# Altium PCB RbMotor_ECAT_RevB+.PcbDoc (part 2 of 4)
Units mm, origin at the board's own origin, x right, y up, seen from the top; angles counter-clockwise.
Board outline 58 x 58 mm, 4 copper layers (F.Cu, In1.Cu, In2.Cu, B.Cu); 285 components, 277 nets, 865 pads, 722 vias.
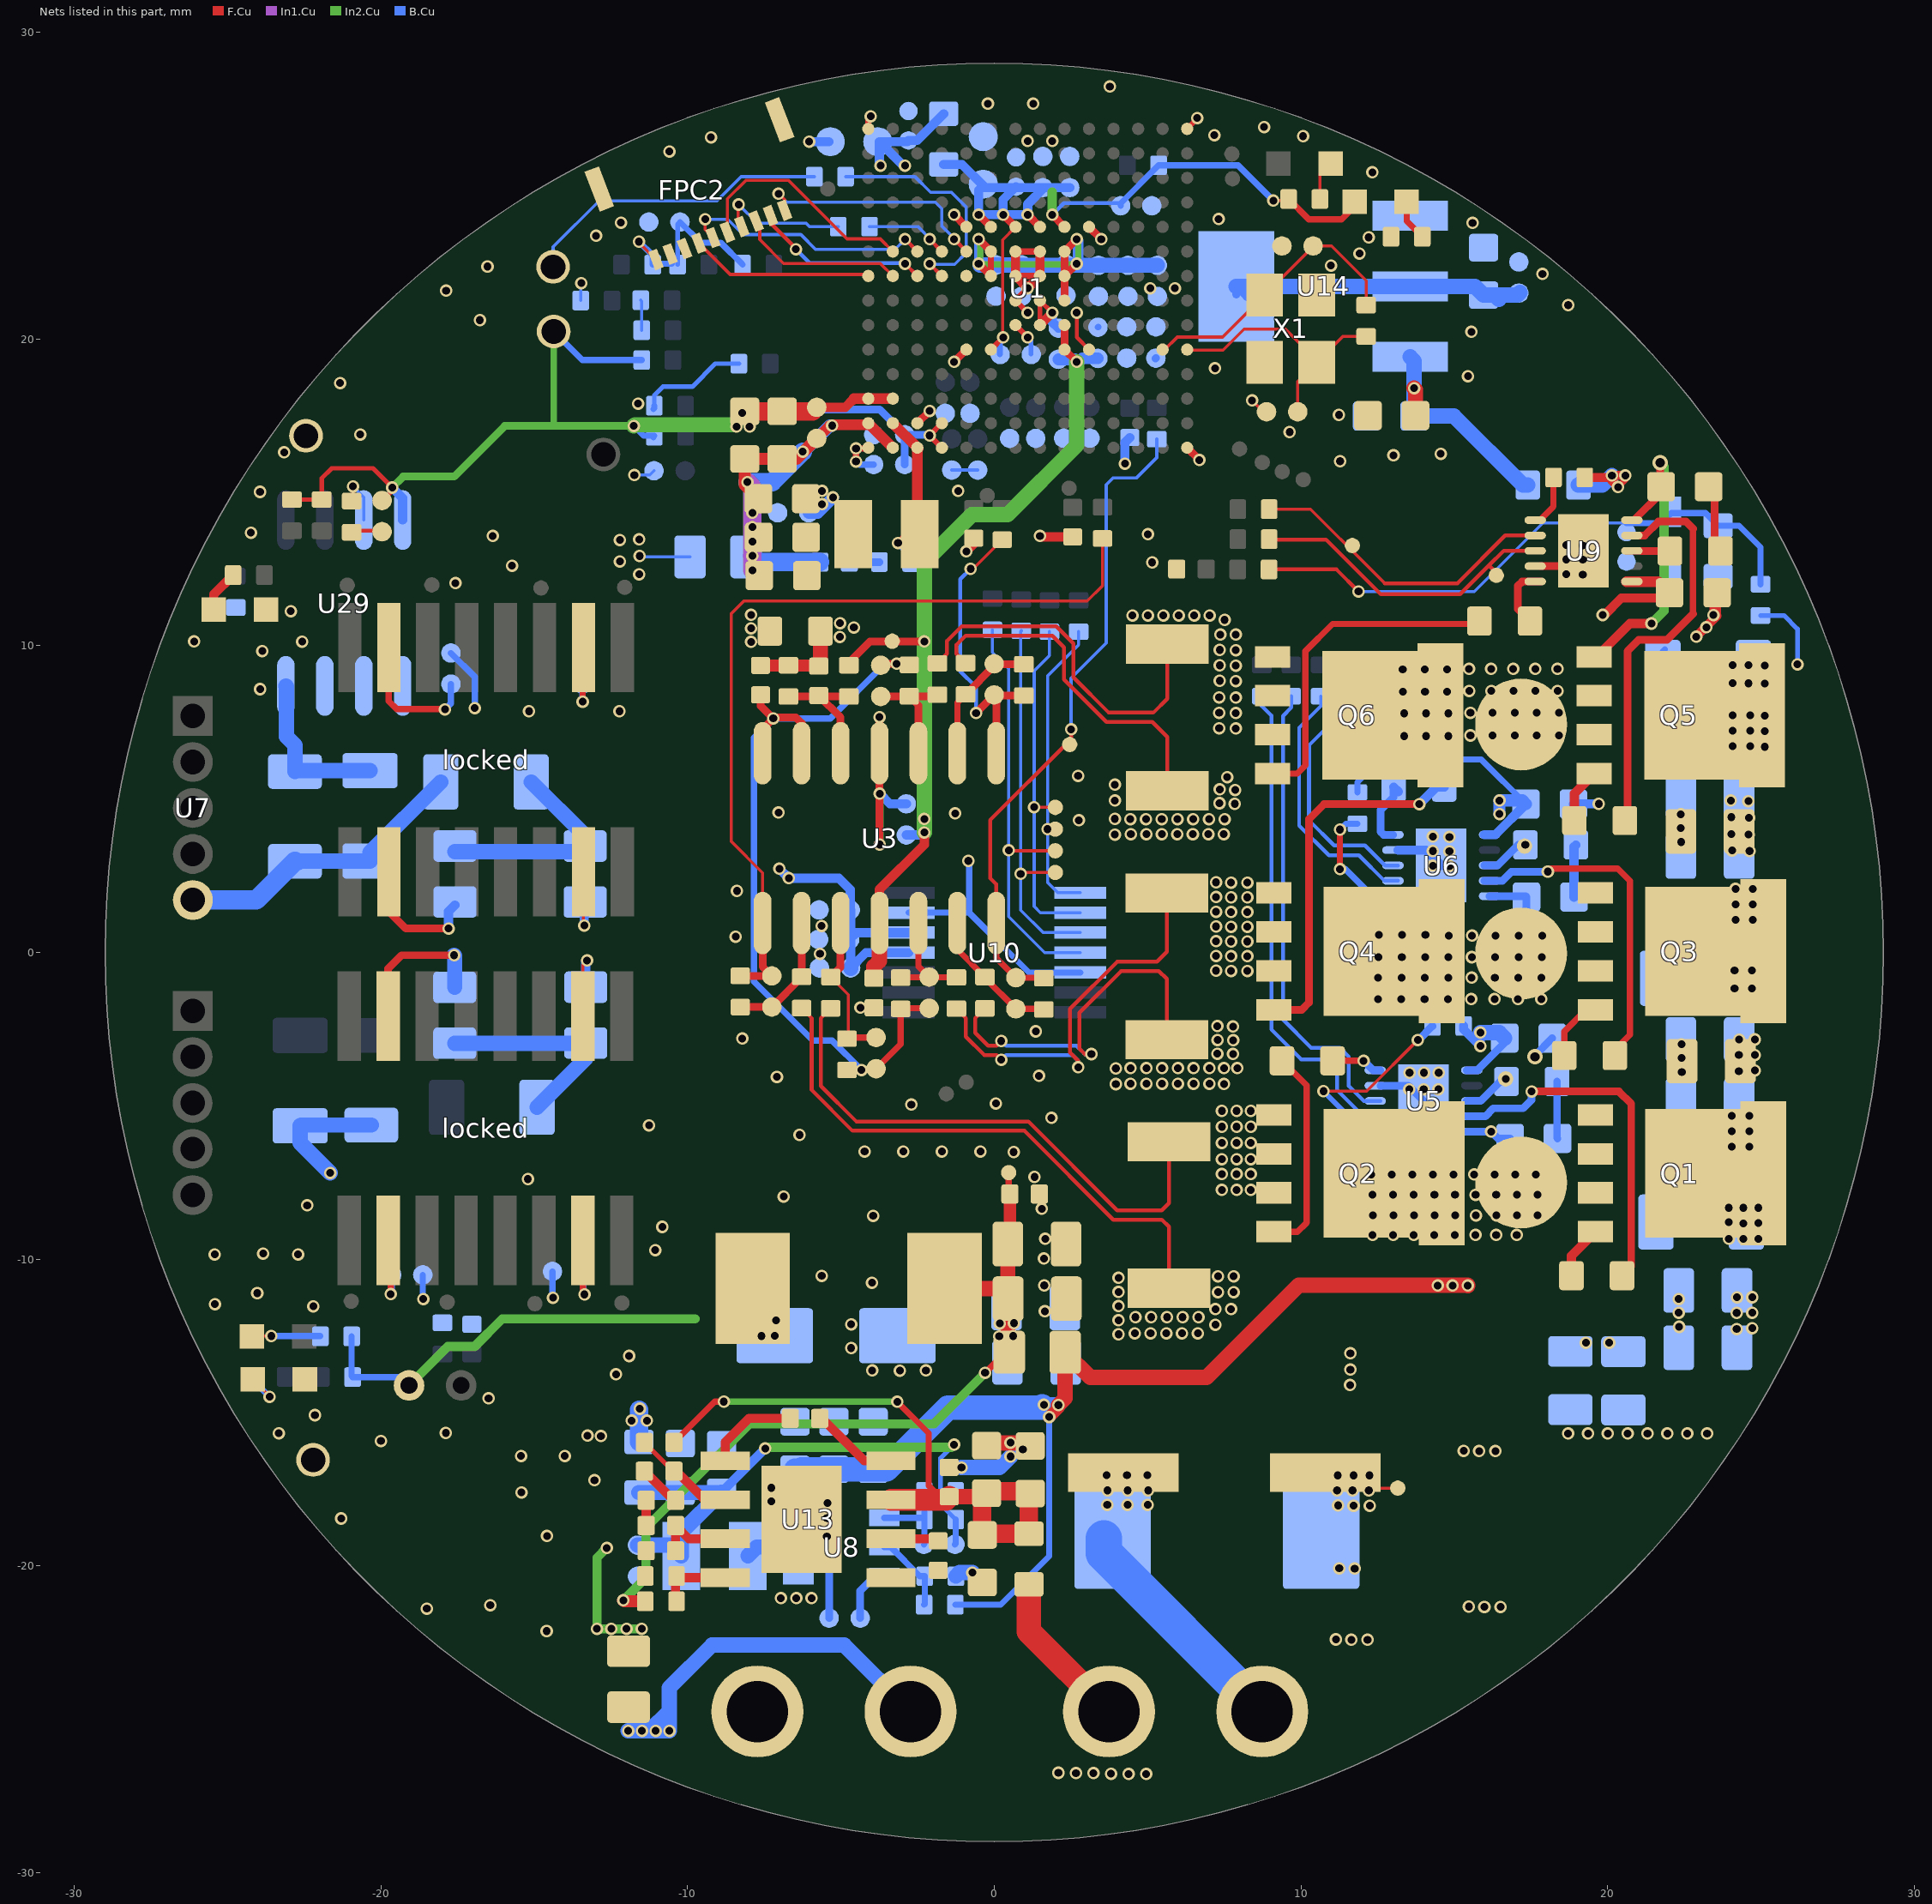
[diagram p4: the nets of this part, all layers, seen from the top]

## Part data
C1 C2 C7 C10 C14 C41 C43 C52 C53 C54 C63 C64 C65 C75 C76 C79 C80 C82 C95 C102 C109 C111 C113 C114: library part C_0603_1608Metric, "Capacitor SMD 0603 (1608 Metric), square (rectangular) end terminal, IPC_7351 nominal, (Body size source: IPC-SM-782 page 76, https://www.pcb-3d.com/wordpress/wp-content/uploads/ipc-sm-782a_amendment_1_and_2.pdf), generated with kicad-footprint-generator"
  C1 C79 C80: Company=SAMSUNG(三星), Model=CL10A226MP8NUNE, Sheetfile=01.SYS_POWER.kicad_sch, Sheetname=01.SYS_POWER, ki_description=0603, ki_keywords="cap capacitor"
  C2 C65 C95: Company=SAMSUNG(三星), Model=CL10A106MA8NRNC, Sheetfile=01.SYS_POWER.kicad_sch, Sheetname=01.SYS_POWER, ki_description=0603, ki_keywords="cap capacitor"
  C7: Company=SAMSUNG(三星), Model=CL10A105KO8NNNC, Sheetfile="13.Motor DriverB.kicad_sch", Sheetname="13.Motor DriverB", ki_description=0603
  C10 C82 C111 C113 C114: Company=SAMSUNG(三星), Model=CL10A226MP8NUNE, Sheetfile=02.MCU_POWER.kicad_sch, Sheetname=02.MCU_POWER, ki_description=0603, ki_keywords="cap capacitor"
  C14 C109: Company=YAGEO, Model=CC0603JRX7R9BB104, Sheetfile=01.SYS_POWER.kicad_sch, Sheetname=01.SYS_POWER, ki_description=0402, ki_keywords="cap capacitor"
  C41 C43: Company=SAMSUNG(三星), Model=CL10A106KP8NNNC, Sheetfile=03.MCU_PA_JTAG.kicad_sch, Sheetname=03.MCU_PA_JTAG, ki_description=0603
  C52: Company=YAGEO, Model=CC0603JRX7R9BB104, Sheetfile="13.Motor DriverB.kicad_sch", Sheetname="13.Motor DriverB", ki_description=0402, ki_keywords="cap capacitor"
  C53: Company=SAMSUNG(三星), Model=CL10A105KO8NNNC, Sheetfile="12.Motor DriverA.kicad_sch", Sheetname="12.Motor DriverA", ki_description=0603
  C54: Company=YAGEO, Model=CC0603JRX7R9BB104, Sheetfile="12.Motor DriverA.kicad_sch", Sheetname="12.Motor DriverA", ki_description=0402, ki_keywords="cap capacitor"
  C63: Company=SAMSUNG(三星), Model=CL10A105KO8NNNC, Sheetfile="14.Motor DriverC.kicad_sch", Sheetname="14.Motor DriverC", ki_description=0603
  C64: Company=YAGEO, Model=CC0603JRX7R9BB104, Sheetfile="14.Motor DriverC.kicad_sch", Sheetname="14.Motor DriverC", ki_description=0402, ki_keywords="cap capacitor"
  C75 C76 C102: Company=muRata(村田), Sheetfile=01.SYS_POWER.kicad_sch, Sheetname=01.SYS_POWER, ki_description=0805, ki_keywords="cap capacitor"
C3 C4 C5 C8 C9 C11 C12 C13 C18 C20 C21 C22 C23 C26 C27 C28 C29 C30 C31 C36 C37 C38 C40 C42 C44 C45 C46 C47 C48 C50 C67 C72 C78 C81 C84 C85 C86 C87 C88 C89 C92 C99 C100 C103 C104 C106 C112 C115 C116: library part C_0402
  C3 C4 C22 C23 C99 C112 C115: Company=SAMSUNG(三星), Model=CL05B104KO5NNNC, Sheetfile=02.MCU_POWER.kicad_sch, Sheetname=02.MCU_POWER, ki_description=0402, ki_keywords="cap capacitor"
  C5 C86 C87: Company=SAMSUNG(三星), Model=CL05A106MP5NUNC, Sheetfile=02.MCU_POWER.kicad_sch, Sheetname=02.MCU_POWER, ki_description=0402, ki_keywords="cap capacitor"
  C8 C11 C12 C40 C42 C45 C48: Company=SAMSUNG(三星), Model=CL05B104KO5NNNC, Sheetfile=08.MCU_OSC.kicad_sch, Sheetname=08.MCU_OSC, ki_description=0402, ki_keywords="cap capacitor"
  C9 C67 C88: Company=SAMSUNG(三星), Model=CL05A106MP5NUNC, Sheetfile=08.MCU_OSC.kicad_sch, Sheetname=08.MCU_OSC, ki_description=0402, ki_keywords="cap capacitor"
  C13 C18 C46 C47: Company=SAMSUNG(三星), Model=CL05B103KB5NNNC, Sheetfile=09.ECAT_IN_OUT.kicad_sch, Sheetname=09.ECAT_IN_OUT, ki_description="Unpolarized capacitor", ki_keywords="cap capacitor"
  C20 C21: Company=SAMSUNG(三星), Model=CL05A475MP5NRNC, Sheetfile=02.MCU_POWER.kicad_sch, Sheetname=02.MCU_POWER, ki_description=0402, ki_keywords="cap capacitor"
  C26 C27 C28 C29 C30 C31: Company=FH(风华), Model=0402CG270J500NT, Sheetfile="11.Current sampling.kicad_sch", Sheetname="11.Current sampling", ki_description=0402
  C36 C44: Company=SAMSUNG(三星), Model=CL05A475MP5NRNC, Sheetfile=08.MCU_OSC.kicad_sch, Sheetname=08.MCU_OSC, ki_description=0402, ki_keywords="cap capacitor"
  C37 C38: Company=YAGEO(国巨), Model=CC0402JRNPO9BN120, Sheetfile=08.MCU_OSC.kicad_sch, Sheetname=08.MCU_OSC, ki_description=0402, ki_keywords="cap capacitor"
  C50 C85 C106 C116: Company=SAMSUNG(三星), Model=CL05B104KO5NNNC, Sheetfile=03.MCU_PA_JTAG.kicad_sch, Sheetname=03.MCU_PA_JTAG, ki_description=0402, ki_keywords="cap capacitor"
  C72 C81 C104: Company=SAMSUNG(三星), Model=CL05B104KO5NNNC, Sheetfile=01.SYS_POWER.kicad_sch, Sheetname=01.SYS_POWER, ki_description="Unpolarized capacitor", ki_keywords="cap capacitor"
  C78: Company=FH(风华), Model=0402CG270J500NT, Sheetfile=01.SYS_POWER.kicad_sch, Sheetname=01.SYS_POWER, ki_description=0402
  C84: Company=SAMSUNG(三星), Model=CL05A106MP5NUNC, Sheetfile="11.Current sampling.kicad_sch", Sheetname="11.Current sampling", ki_description=0402, ki_keywords="cap capacitor"
  C89: Company=SAMSUNG(三星), Model=CL05B104KO5NNNC, Sheetfile="10.AS5047 Encoder.kicad_sch", Sheetname="10.AS5047 Encoder", ki_description=0402, ki_keywords="cap capacitor"
  C92 C100: Company=SAMSUNG(三星), Model=CL05A106MP5NUNC, Sheetfile="10.AS5047 Encoder.kicad_sch", Sheetname="10.AS5047 Encoder", ki_description=0402, ki_keywords="cap capacitor"
  C103: Company=SAMSUNG(三星), Model=CL05B104KO5NNNC, Sheetfile=15.EEROM.kicad_sch, Sheetname=15.EEROM, ki_description="Unpolarized capacitor", ki_keywords="cap capacitor"
C6 C15 C16 C60 C62 C83 C110: library part C_1206_3216Metric, ki_description=1206, ki_keywords="cap capacitor"
  C6: Company=FH(风华), Model=1206B102K202NT, Sheetfile="13.Motor DriverB.kicad_sch", Sheetname="13.Motor DriverB"
  C15 C16 C83 C110: Company=YAGEO(国巨), Model=CC1206KKX7RDBB102, Sheetfile=09.ECAT_IN_OUT.kicad_sch, Sheetname=09.ECAT_IN_OUT
  C60: Company=FH(风华), Model=1206B102K202NT, Sheetfile="12.Motor DriverA.kicad_sch", Sheetname="12.Motor DriverA"
  C62: Company=FH(风华), Model=1206B102K202NT, Sheetfile="14.Motor DriverC.kicad_sch", Sheetname="14.Motor DriverC"
C17 C19 C24 C25 C33 C39 C49 C55 C58 C59 C61 C69 C70 C77 C96 C97 C98: library part C_0805_2012Metric, Sheetfile=01.SYS_POWER.kicad_sch, Sheetname=01.SYS_POWER, ki_description=0805
  C17 C19 C24 C25 C33 C39 C49 C55 C58 C59 C61 C70 C96: Company=muRata(村田), Model=GRM21BR6YA106KE43L, ki_keywords="cap capacitor"
  C69 C77 C97 C98: Company=SAMSUNG(三星), Model=CL21A226MAQNNNE
C32 C34 C35 C51 C56 C57 C66 C68 C71 C73 C90 C91 C94 C101 C107 C108 C117 R82 R83 R85 R86: library part C_0402_1005Metric, "Capacitor SMD 0402 (1005 Metric), square (rectangular) end terminal, IPC_7351 nominal, (Body size source: IPC-SM-782 page 76, https://www.pcb-3d.com/wordpress/wp-content/uploads/ipc-sm-782a_amendment_1_and_2.pdf), generated with kicad-footprint-generator"
  C32 C34 C35: Company=YAGEO(国巨), Model=CC0402KRX7R7BB103, Sheetfile="11.Current sampling.kicad_sch", Sheetname="11.Current sampling", ki_description=0402, ki_keywords="cap capacitor"
  C51 C56 C57: Company=SAMSUNG(三星), Model=0402B104K500NT, Sheetfile="11.Current sampling.kicad_sch", Sheetname="11.Current sampling", ki_description=0402, ki_keywords="cap capacitor"
  C66: Company=YAGEO, Model=CC0603JRX7R9BB102, Sheetfile="12.Motor DriverA.kicad_sch", Sheetname="12.Motor DriverA", ki_description=0603, ki_keywords="cap capacitor"
  C68: Company=YAGEO, Model=CC0603JRX7R9BB104, Sheetfile=01.SYS_POWER.kicad_sch, Sheetname=01.SYS_POWER, ki_description=0402, ki_keywords="cap capacitor"
  C71 C73: Company=YAGEO, Sheetfile=01.SYS_POWER.kicad_sch, Sheetname=01.SYS_POWER, ki_description=0402, ki_keywords="cap capacitor"
  C90: Company=YAGEO(国巨), Model=CC0402JRNPO9BN470, Sheetfile=01.SYS_POWER.kicad_sch, Sheetname=01.SYS_POWER, ki_description=0402, ki_keywords="cap capacitor"
  C91: Company=YAGEO, Model=CC0603JRX7R9BB102, Sheetfile=01.SYS_POWER.kicad_sch, Sheetname=01.SYS_POWER, ki_description=0603, ki_keywords="cap capacitor"
  C94 C101: Company=SAMSUNG(三星), Model=CL05B103KB5NNNC, Sheetfile=03.MCU_PA_JTAG.kicad_sch, Sheetname=03.MCU_PA_JTAG, ki_description=0402, ki_keywords="cap capacitor"
  C107: Company=SAMSUNG(三星), Model=CL05B103KB5NNNC, Sheetfile="12.Motor DriverA.kicad_sch", Sheetname="12.Motor DriverA", ki_description=0402, ki_keywords="cap capacitor"
  C108: Company=YAGEO(国巨), Model=CC0402KRX7R7BB103, Sheetfile=15.EEROM.kicad_sch, Sheetname=15.EEROM, ki_description=0402, ki_keywords="cap capacitor"
  C117: Company=SAMSUNG(三星), Model=CL05B222KB5NNNC, Sheetfile=02.MCU_POWER.kicad_sch, Sheetname=02.MCU_POWER, ki_description=0402, ki_keywords="cap capacitor"
  R82: Company=UNI-ROYAL(厚声), Model=0603WAF1003T5E, Sheetfile=01.SYS_POWER.kicad_sch, Sheetname=01.SYS_POWER, ki_description=Resistor, ki_keywords="R res resistor"
  R83: Company=UNI-ROYAL(厚声), Model=0603WAF2492T5E, Sheetfile=01.SYS_POWER.kicad_sch, Sheetname=01.SYS_POWER, ki_description=Resistor, ki_keywords="R res resistor"
  R85: Company=UNI-ROYAL(厚声), Model=0402WGF7322TCE, Sheetfile=01.SYS_POWER.kicad_sch, Sheetname=01.SYS_POWER, ki_description=Resistor, ki_keywords="R res resistor"
  R86: Company=UNI-ROYAL(厚声), Model=0402WGF1003TCE, Sheetfile=01.SYS_POWER.kicad_sch, Sheetname=01.SYS_POWER, ki_description=Resistor, ki_keywords="R res resistor"
C74: library part CAP-SMD_BD8.0-L8.3-W8.3-LS9.1-FD, Company=DMBJ(振宝佳), Model=JBLM2221M035D090RTM, Sheetfile=01.SYS_POWER.kicad_sch, Sheetname=01.SYS_POWER, ki_description="固态电容  SMD"
D1: library part D_SMC, "Diode SMC (DO-214AB)", Company=Littelfuse(美国力特), Model=SMCJ28A, Sheetfile=01.SYS_POWER.kicad_sch, Sheetname=01.SYS_POWER, ki_description=静电和浪涌保护(TVS/ESD)
D6: library part D_SMA, "Diode SMA (DO-214AC)", Company=YANGJIE(扬杰), Model=SS34A, Sheetfile=01.SYS_POWER.kicad_sch, Sheetname=01.SYS_POWER, ki_description=肖特基二极管，40V,3A
D10: library part SOD-323, Company=Nexperia(安世), Model=BZX384-C5V1, Sheetfile="12.Motor DriverA.kicad_sch", Sheetname="12.Motor DriverA", ki_description="稳压二极管 11V"
FB1 FB3 FB4 FB5 R15 R45 R46 R50 R53 R54 R71 R72 R76 R87 R92: library part R_0603_1608Metric
  FB1 FB3: Company=muRata(村田), Model=BLM18KG601SN1D, Sheetfile=01.SYS_POWER.kicad_sch, Sheetname=01.SYS_POWER, ki_description=BLM18KG601SN1D
  FB4: Company=Sunlord(顺络), Model=PZ1608D101-2R0TF, Sheetfile=01.SYS_POWER.kicad_sch, Sheetname=01.SYS_POWER, ki_description=PZ1608D101-2R0TF
  FB5: Company=Sunlord(顺络), Model=PZ1608D101-2R0TF, Sheetfile=03.MCU_PA_JTAG.kicad_sch, Sheetname=03.MCU_PA_JTAG, ki_description=PZ1608D101-2R0TF
  R15 R50: Company=UNI-ROYAL(厚声), Model=0603WAF470JT5E, Sheetfile="13.Motor DriverB.kicad_sch", Sheetname="13.Motor DriverB", ki_description=水泥电阻
  R45: Company=UNI-ROYAL(厚声), Model=0603WAF0000T5E, Sheetfile="11.Current sampling.kicad_sch", Sheetname="11.Current sampling", ki_description=Resistor, ki_keywords="R res resistor"
  R46: Company=UNI-ROYAL(厚声), Model=0603WAF220KT5E, Sheetfile="13.Motor DriverB.kicad_sch", Sheetname="13.Motor DriverB", ki_description=Resistor, ki_keywords="R res resistor"
  R53 R54: Company=UNI-ROYAL(厚声), Model=0603WAF470JT5E, Sheetfile="12.Motor DriverA.kicad_sch", Sheetname="12.Motor DriverA", ki_description=水泥电阻
  R71 R76: Company=UNI-ROYAL(厚声), Model=0603WAF470JT5E, Sheetfile="14.Motor DriverC.kicad_sch", Sheetname="14.Motor DriverC", ki_description=水泥电阻
  R72: Company=UNI-ROYAL(厚声), Model=0603WAF220KT5E, Sheetfile="14.Motor DriverC.kicad_sch", Sheetname="14.Motor DriverC", ki_description=Resistor, ki_keywords="R res resistor"
  R87: Company=YAGEO\n, Model=RC0603FR-0710KL\n, Sheetfile="12.Motor DriverA.kicad_sch", Sheetname="12.Motor DriverA", ki_description=Resistor, ki_keywords="R res resistor"
  R92: Company=UNI-ROYAL(厚声), Model=0603WAF220KT5E, Sheetfile="12.Motor DriverA.kicad_sch", Sheetname="12.Motor DriverA", ki_description=Resistor, ki_keywords="R res resistor"
FB2 R3 R4 R5 R17 R18 R21: library part R_0805_2012Metric, "Resistor SMD 0805 (2012 Metric), square (rectangular) end terminal, IPC_7351 nominal, (Body size source: IPC-SM-782 page 72, https://www.pcb-3d.com/wordpress/wp-content/uploads/ipc-sm-782a_amendment_1_and_2.pdf), generated with kicad-footprint-generator"
  FB2: Company=Sunlord(顺络), Model=PZ2012U101-2R0TF, Sheetfile=01.SYS_POWER.kicad_sch, Sheetname=01.SYS_POWER, ki_description=PZ2012U101-2R0TF
  R3: Company=FH(风华), Model=RS-05000JT, Sheetfile=01.SYS_POWER.kicad_sch, Sheetname=01.SYS_POWER, ki_description=Resistor, ki_keywords="R res resistor"
  R4 R5 R17 R18: Company=UNI-ROYAL(厚声), Model=0805W8F750JT5E, Sheetfile=09.ECAT_IN_OUT.kicad_sch, Sheetname=09.ECAT_IN_OUT, ki_description=Resistor, ki_keywords="R res resistor"
  R21: Company=FH(风华), Model=RS-05000JT, Sheetfile=02.MCU_POWER.kicad_sch, Sheetname=02.MCU_POWER, ki_description=Resistor, ki_keywords="R res resistor"
FPC2: library part FPC_10P_0.5mm_JTAG, Company=THD(台华达), Model=THD0510-10CL-GF, Sheetfile=03.MCU_PA_JTAG.kicad_sch, Sheetname=03.MCU_PA_JTAG, ki_description=下接
J1 J5: library part "XT30U 母头插座", Model="XT30UPB-M 公头 PCB焊板", Sheetfile=01.SYS_POWER.kicad_sch, Sheetname=01.SYS_POWER, ki_description=P2.54, ki_keywords=connector
L1 L3: library part L252010, Company=muRata(村田), Model=DFE252010F-4R7M, ki_description=DFE252010F-4R7M
  L1: Sheetfile=02.MCU_POWER.kicad_sch, Sheetname=02.MCU_POWER
  L3: Sheetfile=01.SYS_POWER.kicad_sch, Sheetname=01.SYS_POWER
L2: library part IND-SMD_L7.0-W6.6_FXL0630, Company=cjiang(长江微电), Model=FXL0630-150-M, Sheetfile=01.SYS_POWER.kicad_sch, Sheetname=01.SYS_POWER, ki_description=1276AS-H-4R7M=P2
LED1 LED2 LED3 LED4 LED5: library part LED_0603, Company=国星光电
  LED1: Model=NCD0603C1, Sheetfile=01.SYS_POWER.kicad_sch, Sheetname=01.SYS_POWER
  LED2 LED5: Model=NCD0603C1, Sheetfile=09.ECAT_IN_OUT.kicad_sch, Sheetname=09.ECAT_IN_OUT
  LED3: Model=NCD0603R1, Sheetfile=09.ECAT_IN_OUT.kicad_sch, Sheetname=09.ECAT_IN_OUT, ki_description=0603
  LED4: Model=NCD0603R1, Sheetfile=05.MCU_PC.kicad_sch, Sheetname=05.MCU_PC
locked locked: library part H1102_XFMR16_SM, Company=YDS(元册科技), Model=11FB-05NL, Sheetfile=09.ECAT_IN_OUT.kicad_sch, Sheetname=09.ECAT_IN_OUT
Q1 Q2 Q3 Q4 Q5 Q6: library part sot_669_2, Company=Nexperia(安世), Model=PSMN1R4-40YLD, ki_description="场效应管 N沟道"
  Q1 Q2: Sheetfile="12.Motor DriverA.kicad_sch", Sheetname="12.Motor DriverA"
  Q3 Q4: Sheetfile="13.Motor DriverB.kicad_sch", Sheetname="13.Motor DriverB"
  Q5 Q6: Sheetfile="14.Motor DriverC.kicad_sch", Sheetname="14.Motor DriverC"
R1 R2 R6 R7 R8 R9 R11 R12 R13 R14 R16 R19 R20 R22 R23 R24 R25 R26 R27 R28 R29 R30 R31 R32 R33 R34 R35 R36 R37 R38 R39 R40 R41 R42 R43 R44 R47 R48 R51 R56 R57 R58 R59 R60 R61 R62 R63 R64 R65 R66 R67 R68 R70 R75 R79 R80 R84 R88 R89 R90 R91 R128 R129 R130: library part R_0402_1005Metric, ki_description=Resistor
  R1 R24 R27 R29 R31 R33 R37 R38: Company=UNI-ROYAL(厚声), Model=0402WGF1002TCE, Sheetfile="11.Current sampling.kicad_sch", Sheetname="11.Current sampling", ki_keywords="R res resistor"
  R2 R7: Company=FH(风华), Model=RC-02W2491FT, Sheetfile=09.ECAT_IN_OUT.kicad_sch, Sheetname=09.ECAT_IN_OUT, ki_keywords="R res resistor"
  R6 R9 R11 R12 R13 R16: Company=UNI-ROYAL(厚声), Sheetfile="11.Current sampling.kicad_sch", Sheetname="11.Current sampling", ki_keywords="R res resistor"
  R8: Company=UNI-ROYAL(厚声), Model=0402WGF1001TCE, Sheetfile=01.SYS_POWER.kicad_sch, Sheetname=01.SYS_POWER, ki_keywords="R res resistor"
  R14: Company=UNI-ROYAL(厚声), Model=CQ02WGJ0105TCE, Sheetfile=08.MCU_OSC.kicad_sch, Sheetname=08.MCU_OSC, ki_keywords="R res resistor"
  R19: Company=UNI-ROYAL(厚声), Model=0402WGF1002TCE, Sheetfile="13.Motor DriverB.kicad_sch", Sheetname="13.Motor DriverB", ki_keywords="R res resistor"
  R20: Company=UNI-ROYAL(厚声), Model=0402WGF1002TCE, Sheetfile="12.Motor DriverA.kicad_sch", Sheetname="12.Motor DriverA", ki_keywords="R res resistor"
  R22: Company=UNI-ROYAL(厚声), Model=0402WGF100JTCE, Sheetfile=02.MCU_POWER.kicad_sch, Sheetname=02.MCU_POWER, ki_keywords="R res resistor"
  R23 R32 R59: ASSY_OPT=DNP, Company=UNI-ROYAL(厚声), Model=0402WGF4701TCE, Sheetfile=09.ECAT_IN_OUT.kicad_sch, Sheetname=09.ECAT_IN_OUT, ki_keywords="R res resistor"
  R25 R44 R51 R56 R61 R62: Company=UNI-ROYAL(厚声), Model=0402WGF4701TCE, Sheetfile=09.ECAT_IN_OUT.kicad_sch, Sheetname=09.ECAT_IN_OUT, ki_keywords="R res resistor"
  R26: Company=UNI-ROYAL(厚声), Sheetfile=01.SYS_POWER.kicad_sch, Sheetname=01.SYS_POWER, ki_keywords="R res resistor"
  R28: Company=UNI-ROYAL(厚声), Model=0402WGF1002TCE, Sheetfile=08.MCU_OSC.kicad_sch, Sheetname=08.MCU_OSC, ki_keywords="R res resistor"
  R30: Company=UNI-ROYAL(厚声), Model=0402WGF1002TCE, Sheetfile="14.Motor DriverC.kicad_sch", Sheetname="14.Motor DriverC", ki_keywords="R res resistor"
  R34 R35 R36: Company=UNI-ROYAL(厚声), Model=0402WGF100JTCE, Sheetfile="11.Current sampling.kicad_sch", Sheetname="11.Current sampling", ki_keywords="R res resistor"
  R39: ASSY_OPT=DNP, Company=UNI-ROYAL(厚声), Model=0402WGF3300TCE, Sheetfile=09.ECAT_IN_OUT.kicad_sch, Sheetname=09.ECAT_IN_OUT, ki_keywords="R res resistor"
  R40 R60: Company=UNI-ROYAL(厚声), Model=0402WGF3300TCE, Sheetfile=09.ECAT_IN_OUT.kicad_sch, Sheetname=09.ECAT_IN_OUT, ki_keywords="R res resistor"
  R41: Company=UNI-ROYAL(厚声), Model=0402WGF1000TCE, Sheetfile=03.MCU_PA_JTAG.kicad_sch, Sheetname=03.MCU_PA_JTAG, ki_keywords="R res resistor"
  R42 R70 R84: Company=UNI-ROYAL(厚声), Model=0402WGF1002TCE, Sheetfile=01.SYS_POWER.kicad_sch, Sheetname=01.SYS_POWER, ki_keywords="R res resistor"
  R43: Company=UNI-ROYAL(厚声), Model=0402WGF1002TCE, Sheetfile="00. MAIN.kicad_sch", Sheetname=MAIN, ki_keywords="R res resistor"
  R47: Company=UNI-ROYAL(厚声), Model=0402WGF1001TCE, Sheetfile=05.MCU_PC.kicad_sch, Sheetname=05.MCU_PC, ki_keywords="R res resistor"
  R48 R58 R63: Company=UNI-ROYAL(厚声), Model=0402WGF330JTCE, Sheetfile="12.Motor DriverA.kicad_sch", Sheetname="12.Motor DriverA", ki_keywords="R res resistor"
  R57: Company=UNI-ROYAL(厚声), Model=0402WGF1002TCE, Sheetfile=15.EEROM.kicad_sch, Sheetname=15.EEROM, ki_keywords="R res resistor"
  R64 R65: Company=UNI-ROYAL(厚声), Model=0402WGF330JTCE, Sheetfile="13.Motor DriverB.kicad_sch", Sheetname="13.Motor DriverB", ki_keywords="R res resistor"
  R66 R68: Company=UNI-ROYAL(厚声), Model=0402WGF330JTCE, Sheetfile="14.Motor DriverC.kicad_sch", Sheetname="14.Motor DriverC", ki_keywords="R res resistor"
  R67: Company=UNI-ROYAL(厚声), Model=0402WGF4532TCE, Sheetfile=01.SYS_POWER.kicad_sch, Sheetname=01.SYS_POWER, ki_keywords="R res resistor"
  R75: Company=UNI-ROYAL(厚声), Model=0402WGF1002TCE, Sheetfile=03.MCU_PA_JTAG.kicad_sch, Sheetname=03.MCU_PA_JTAG, ki_keywords="R res resistor"
  R79: Company=UNI-ROYAL(厚声), Model=0402WGF2003TCE, Sheetfile="12.Motor DriverA.kicad_sch", Sheetname="12.Motor DriverA"
  R80: Company=UNI-ROYAL(厚声), Model=0402WGF1403TCE, Sheetfile=01.SYS_POWER.kicad_sch, Sheetname=01.SYS_POWER, ki_keywords="R res resistor"
  R88 R89 R90 R91: Company=UNI-ROYAL(厚声), Model=0402WGF330JTCE, Sheetfile="00. MAIN.kicad_sch", Sheetname=MAIN, ki_keywords="R res resistor"
  R128 R129 R130: Company=UNI-ROYAL(厚声), Model=0402WGF4701TCE, Sheetfile=15.EEROM.kicad_sch, Sheetname=15.EEROM, ki_keywords="R res resistor"
R10 R69: library part R_1206_3216Metric, Company=Viking(光颉), Model=ARG06BTC1004, Sheetfile=09.ECAT_IN_OUT.kicad_sch, Sheetname=09.ECAT_IN_OUT, ki_description=Resistor, ki_keywords="R res resistor"
R49: library part RES-TH_L2.5-W2.5-P1.70-D0.3, SuppliersPartNumber=C5439706, Company=SURGING(绍鑫), Model=MF52A103F3950, Sheetfile=15.EEROM.kicad_sch, Sheetname=15.EEROM, ki_description=NTC热敏电阻
R52 R55 R78: library part R2010, Company=Milliohm(毫欧), Model=HoLR2010-1W-1mR-1%, ki_description=Resistor
  R52: Sheetfile="13.Motor DriverB.kicad_sch", Sheetname="13.Motor DriverB"
  R55: Sheetfile="12.Motor DriverA.kicad_sch", Sheetname="12.Motor DriverA"
  R78: Sheetfile="14.Motor DriverC.kicad_sch", Sheetname="14.Motor DriverC"
TP1 TP2 TP3 TP9 TP10 TP11 TP12 TP13 TP14 TP15 TP16 TP17 TP18 TP19 TP20 TP21 TP22 TP23 TP24 TP25 TP26 TP27 TP28 TP29 TP30 TP31 TP32 TP33 TP35 TP36 TP40: library part TestPoint_Pad_D0.5mm, "SMD pad as test Point, diameter 1.0mm", ki_description="test point", ki_keywords="test point tp"
  TP1 TP36 TP40: Sheetfile=01.SYS_POWER.kicad_sch, Sheetname=01.SYS_POWER
  TP2 TP3 TP9 TP12 TP13 TP15 TP18 TP19 TP20 TP21 TP22 TP23 TP24 TP25 TP26 TP27 TP28 TP29 TP30 TP31 TP32: Sheetfile="00. MAIN.kicad_sch", Sheetname=MAIN
  TP10 TP11: Sheetfile="14.Motor DriverC.kicad_sch", Sheetname="14.Motor DriverC"
  TP14: Sheetfile="11.Current sampling.kicad_sch", Sheetname="11.Current sampling"
  TP16: Sheetfile="13.Motor DriverB.kicad_sch", Sheetname="13.Motor DriverB"
  TP17: Sheetfile="12.Motor DriverA.kicad_sch", Sheetname="12.Motor DriverA"
  TP33 TP35: Sheetfile=05.MCU_PC.kicad_sch, Sheetname=05.MCU_PC
TP4 TP5 TP6: library part SMD_3mm_Pad, ki_description="test point", ki_keywords="test point tp"
  TP4: Sheetfile="13.Motor DriverB.kicad_sch", Sheetname="13.Motor DriverB"
  TP5: Sheetfile="12.Motor DriverA.kicad_sch", Sheetname="12.Motor DriverA"
  TP6: Sheetfile="14.Motor DriverC.kicad_sch", Sheetname="14.Motor DriverC"
TP7 TP8 TP37 TP38 TP39: library part TestPoint_1.5, "SMD pad as test Point, diameter 1.0mm", ki_description="test point", ki_keywords="test point tp"
  TP7 TP8 TP37: Sheetfile=03.MCU_PA_JTAG.kicad_sch, Sheetname=03.MCU_PA_JTAG
  TP38 TP39: Sheetfile=08.MCU_OSC.kicad_sch, Sheetname=08.MCU_OSC
U1: library part BGA-196_14x14_12.0x12.0mm_P0.8mm, Sheetfile=02.MCU_POWER.kicad_sch, Sheetname=02.MCU_POWER
U2 U7: library part CONN-TH_ZH1.5-5A, Company=Bossie(博锡), Model=BX-ZH1.5-5PZZ, Sheetfile=09.ECAT_IN_OUT.kicad_sch, Sheetname=09.ECAT_IN_OUT
U3: library part SOIC-14_L8.7-W3.9, Company=3PEAK(思瑞浦), Model=TP2274-SR, Sheetfile="11.Current sampling.kicad_sch", Sheetname="11.Current sampling", ki_description=TP2274-TR,TSSOP-14,3PEAK
U5 U6 U9: library part QFN-10_L3.0-W3.0-P0.50-LS3.0-BL-EP, ki_description="MP1907GQ–Z,QFN10 (3 x 3 mm),MPS"
  U5: Sheetfile="12.Motor DriverA.kicad_sch", Sheetname="12.Motor DriverA"
  U6: Sheetfile="13.Motor DriverB.kicad_sch", Sheetname="13.Motor DriverB"
  U9: Sheetfile="14.Motor DriverC.kicad_sch", Sheetname="14.Motor DriverC"
U8: library part SOT-23-6, Company=TI, Model=TPS54302DDCR, Sheetfile=01.SYS_POWER.kicad_sch, Sheetname=01.SYS_POWER
U10: library part TSSOP-14_L5.0-W4.4-P0.65-LS6.4-BL, SuppliersPartNumber=C962063, Company=ams(艾迈斯半导体), Model=AS5047P-ATSM, Sheetfile="10.AS5047 Encoder.kicad_sch", Sheetname="10.AS5047 Encoder", ki_description=位置传感器
U13: library part SOIC-8EP, Company=Joulwatt(杰华特), Model=JW5116FESOP#TRPBF, Sheetfile=01.SYS_POWER.kicad_sch, Sheetname=01.SYS_POWER, ki_description=DC-DC电源芯片
U14: library part SOT-223-4_L6.5-W3.5-P2.30-LS7.0-BR, Company=ST(意法半导体), Model=LDL1117S33R, Sheetfile=01.SYS_POWER.kicad_sch, Sheetname=01.SYS_POWER, ki_description=线性稳压器(LDO)
U29: library part SOIC-8, Company=IDCHIP(英锐芯), Model=AT24C02, Sheetfile=15.EEROM.kicad_sch, Sheetname=15.EEROM, ki_description="I2C 存储容量：2Kbit", ki_keywords="Nonvolatile Non-Volatile Memory ROM ST"
X1: library part 3225, Company=EPSON(爱普生), Model=X1E0000210129, Sheetfile=08.MCU_OSC.kicad_sch, Sheetname=08.MCU_OSC

## Via types
v1: diameter 0.406, hole 0.254, F.Cu to B.Cu, tented both sides, 720 vias
v2: diameter 0.5, hole 0.3, F.Cu to B.Cu, tented both sides, 2 vias

## Nets (pads, with @x,y where several pads share a name; then routed paths per layer and width w, separated by ;. In a path a pad name is that pad's centre, name@x,y a point inside that pad or via, vN(x,y) a via of type N, cw(c..) or ccw(c..) an arc to the next point about the centre after c; other vN are vias at no path point)
+1V2: C3.1 C4.1 C5.1 C82.1 C86.1 C87.1 C99.1 C111.1 C113.1 C115.1 L1.1 U1.F6 U1.F9 U1.G6 U1.G9 U1.H9 | length 18.1
  F.Cu w0.2: U1.G6@-0.11,22.06 U1.F6@-0.11,22.86
  F.Cu w0.254: v1(-0.51,22.46) U1.G6@-0.11,22.06 ; v1(-0.51,23.26) U1.F6@-0.11,22.86 ; U1.H9@2.29,21.26 U1.F9@2.29,22.86 v1(2.69,23.26) ; U1.G9@2.29,22.06 v1(2.69,22.46)
  In2.Cu w0.2: v1@-0.46,23.24 -0.46,22.44 2.74,22.44 v1@2.74,23.24
  B.Cu w0.203: C115.1@-6.052,14.34 C115.1@-6.052,14.512
  B.Cu w0.3: v1(-0.51,22.46) v1(-0.51,23.26)
  B.Cu w0.35: v1(-0.51,22.46) v1@-0.468,22.418 ; v1(2.69,23.26) 2.74,23.21 v1@2.74,22.44
  B.Cu w0.4: C115.1@-6.052,14.34 -5.76,14.34 v1(-5.26,14.84)
  B.Cu w0.5: v1@-0.468,22.418 0.658,22.418 0.666,22.41 C5.1@5.318,22.41
  other v1: -5.62,14.62 -5.62,15.05
+3.3V: C8.2 C9.1 C10.1 C41.1 C42.1 C89.1 C92.1 C94.1 C100.1 C103.1 C106.1 C112.1 C114.1 FB1.1 FB5.2 FPC2.10 LED1.2 R23.2 R25.2 R28.1 R43.2 R47.1 R49.2 R51.2 R60.2 R61.2 R62.2 R129.2 R130.2 TP8.1 U1.E9 U1.M1 U1.M2 U1.N4 U1.P4 U10.11 U10.12 U29.8 | length 87.2
  F.Cu w0.102: v1(-11.59,23.18) -11.59,23.148 FPC2.10@-11.038,22.596 ; v1(9.1,24.52) 9.55,24.52 R47.1@9.6,24.57
  F.Cu w0.127: C103.1@-19.97,14.71 -19.64,15.04 v1(-19.64,15.16)
  F.Cu w0.15: R129.2@-22.91,14.77 R130.2@-21.94,14.77 -21.94,15.46 -21.61,15.79 -20.27,15.79 v1(-19.64,15.16)
  F.Cu w0.178: U1.P4@-1.71,16.46 v1(-2.11,16.86) U1.N4@-1.71,17.26
  F.Cu w0.203: R47.1@9.6,24.57 10.26,23.91 11.33,23.91 11.749,24.329 LED1.2@11.749,24.48
  F.Cu w0.254: v1(1.89,24.06) U1.E9@2.29,23.66
  F.Cu w0.3: C112.1@-5.79,17.778 -4.862,17.778 -4.6,18.04
  F.Cu w0.35: -4.6,18.04 -4.58,18.06 U1.M1@-4.11,18.06 U1.M2@-3.31,18.06
  F.Cu w0.6: C10.1@-8.14,17.645 C114.1@-6.92,17.645 C112.1@-5.923,17.645
  In2.Cu w0.2: -14.39,17.17 -14.37,17.19 TP8.1@-14.37,20.25
  In2.Cu w0.25: v1(-19.64,15.16) -19.28,15.52 -17.62,15.52 -15.97,17.17 -14.39,17.17 v1(-11.76,17.17)
  In2.Cu w0.3: R49.2@-19.09,-14.12 -17.82,-12.85 -16.95,-12.85 -16.05,-11.95 -9.76,-11.95 ; v1(1.89,24.06) 1.89,24.8
  In2.Cu w0.5: v1(-11.76,17.17) -11.72,17.21 v1@-8.44,17.21
  B.Cu w0.102: R49.2@-19.36,-13.85 R49.2@-19.09,-14.12 ; R62.2@-8.375,22.674 -8.21,22.509 R62.2@-8.21,22.43
  B.Cu w0.13: v1(1.89,24.06) 2.27,24.44 4.032,24.44 C42.1@4.122,24.35
  B.Cu w0.15: R61.2@-10.33,22.43 -10.33,23.742 C106.1@-10.252,23.82
  B.Cu w0.2: R60.2@-20.96,-12.52 -20.96,-13.82 R25.2@-20.93,-13.85 R49.2@-19.36,-13.85 ; TP8.1@-14.37,20.25 -13.44,19.32 R23.2@-11.5,19.32 ; v1@-11.62,-14.9 v1@-11.59,-14.93 ; v1(-11.59,23.18) -11.14,22.73 R51.2@-11.14,22.43 ; R51.2@-11.11,22.46 R61.2@-10.52,22.46 ; C106.1@-10.252,23.82 -9.582,23.15 -8.93,23.15 R62.2@-8.21,22.43 ; C42.1@4.122,24.35 4.122,24.432 R43.2@5.36,25.67 7.95,25.67 v1(9.1,24.52)
  B.Cu w0.203: v1(-11.76,17.17) -11.44,16.85 R28.1@-11.09,16.85 -11.12,16.82 R28.1@-11.12,16.8
  B.Cu w0.25: v1(-8.22,17.59) -8.1,17.71 -3.745,17.71 C9.1@-2.92,16.885 ; C8.2@-2.92,15.91 C9.1@-2.92,16.885 ; v1(-2.11,16.86) -2.135,16.885 C9.1@-2.92,16.885
  B.Cu w0.3: v1(-19.64,15.16) -19.297,14.817 U29.8@-19.297,14.101 ; R49.2@-19.36,-14.12 R49.2@-19.09,-14.12 ; v1@-11.59,-14.91 v1(-11.56,-14.88) ; v1(-7.01,2.73) v1(-6.7,2.42) -5.07,2.42 -4.697,2.047 C100.1@-4.697,1.386 -4.687,1.376 C92.1@-4.687,-0.504 -4.187,-0.004 U10.11@-2.795,-0.004 ; C89.1@-4.717,0.426 -4.497,0.646 U10.12@-2.795,0.646 ; v1(-3.71,25.66) -3.75,25.7 C41.1@-3.75,26.44 ; v1(-2.91,25.66) -2.97,25.66 C41.1@-3.75,26.44 ; FB5.2@-1.65,27.35 -2.52,26.48 C94.1@-2.8,26.48 -2.84,26.44 C41.1@-3.75,26.44
  B.Cu w0.5: C92.1@-4.687,-0.504 C92.1@-4.677,-0.514
  B.Cu w0.6: FB1.1@-11.59,-15.965 v1@-11.59,-14.91
  other v1: -11.83,-15.27 -11.33,-15.27 -8.41,17.15 -7.98,17.15
+3.3VA: C1.1 C20.1 C21.1 C22.1 C23.1 C56.2 C84.2 C104.1 R37.2 TP36.1 U1.J9 U1.K9 U3.4 U14.2 U14.4 | length 42.1
  F.Cu w0.25: R37.2@-4.745,9.366 -4.745,9.445 -4.05,10.14 v1(-2.28,10.14) ; U1.J9@2.29,20.46 U1.K9@2.29,19.66 v1(2.69,19.26)
  F.Cu w0.3: U3.4@-3.745,0.116 U3.4@-3.745,0.958 -3.745,2.055 -2.28,3.52 v1(-2.28,3.91)
  F.Cu w0.5: C56.2@-3.925,-0.844 -3.925,-0.455 -3.745,-0.275 U3.4@-3.745,0.958
  In2.Cu w0.5: v1(-2.28,3.91) v1(-2.28,10.14) -2.28,12.73 -0.73,14.28 0.43,14.28 2.69,16.54 v1(2.69,19.26)
  B.Cu w0.254: C20.1@2.068,19.364 C20.1@2.09,19.342 ; C22.1@3.38,19.372 C22.1@3.39,19.382 ; C23.1@5.26,19.372 C23.1@5.27,19.382 ; U14.4@7.895,21.46 U14.4@7.895,21.72 8.225,21.39 U14.4@8.528,21.39
  B.Cu w0.3: C84.2@-2.87,3.83 -2.36,3.83 v1(-2.28,3.91) v1(-2.28,4.35)
  B.Cu w0.381: C20.1@2.09,19.342 2.638,19.342 2.74,19.24 2.872,19.372 C22.1@3.38,19.372
  B.Cu w0.508: U14.4@7.895,21.72 U14.2@13.565,21.72 15.675,21.72 C1.1@15.96,21.435 ; 16.46,21.305 16.33,21.435 C1.1@15.96,21.435 ; C104.1@17.142,21.52 17.057,21.435 C1.1@15.96,21.435
+12V: C2.1 C14.1 C52.1 C54.1 C64.1 C65.1 FB2.1 FB3.1 R19.1 R20.1 R26.2 R30.1 U5.1 U6.1 U8.3 U9.1 | length 58.1
  F.Cu w0.2: v1(20.345,15.176) 20.585,15.416 v1(20.585,15.556) ; C64.1@21.861,11.556 22.025,11.72 C64.1@22.025,11.73
  F.Cu w0.3: R30.1@19.26,15.49 20.078,15.49 v1(20.145,15.556) ; v1(19.845,11.006) 19.905,11.006 20.455,11.556 C64.1@21.861,11.556 ; v1(20.345,15.176) 20.145,15.376 v1(20.145,15.556) ; v1(20.585,15.556) v1(20.145,15.556)
  F.Cu w0.35: U9.1@20.625,12.096 21.659,12.096 C64.1@22.025,11.73
  F.Cu w0.4: v1(1.79,-15.15) 2.09,-14.85 v1(2.09,-14.76)
  F.Cu w0.5: v1(2.09,-14.76) 2.312,-14.537 FB2.1@2.312,-13.04 3.133,-13.86 3.85,-13.86 6.92,-13.86 9.926,-10.854 12.955,-10.854 15.435,-10.854 v1(15.445,-10.864)
  B.Cu w0.2: R26.2@-1.27,-21.27 0.213,-21.27 1.79,-19.693 v1(1.79,-15.15)
  B.Cu w0.203: R19.1@11.845,5.216 11.845,5.555 12.58,6.29 15.886,6.29 C52.1@17.34,4.836 C52.1@17.21,4.966
  B.Cu w0.25: U5.1@15.407,-3.844 15.756,-3.844 16.65,-2.95 C54.1@16.65,-2.794 C54.1@16.59,-2.854
  B.Cu w0.3: R20.1@15.31,-2.4 15.31,-2.509 v1(15.855,-3.054) v1(15.855,-2.614) ; U6.1@15.985,3.836 16.34,3.836 C52.1@17.34,4.836 C52.1@17.33,4.846
  B.Cu w0.4: v1(16.475,4.516) v1(16.475,4.956) 17.22,4.956 C52.1@17.34,4.836
  B.Cu w0.5: C14.1@-6.5,-16.855 -6.3,-16.855 C14.1@-6.29,-16.865 ; U8.3@-6.39,-18.44 U8.3@-6.3,-18.35 ; v1(1.62,-14.75) 2.08,-14.75 v1(2.09,-14.76) ; v1(15.855,-2.614) 16.47,-2.614 C54.1@16.65,-2.794 ; FB3.1@19.05,15.24 19.828,15.24 v1(20.145,15.556)
  B.Cu w0.7: C14.1@-6.5,-16.855 -6.3,-17.055 U8.3@-6.3,-18.35
  B.Cu w0.8: C14.1@-6.29,-16.865 -5.24,-16.865 C65.1@-5.23,-16.855 -3.515,-16.855 -1.51,-14.85 1.52,-14.85 v1@1.56,-14.81
  other v1: 14.465,-10.864 14.945,-10.864
+12VA: C69.1 C73.2 C77.1 C97.1 C98.1 FB2.2 L2.2 R80.2 TP1.1 | length 28.5
  F.Cu w0.102: v1(-0.3,-13.71) v1@-0.182,-13.71
  F.Cu w0.2: v1(-0.3,-13.71) 0.37,-13.04 FB2.2@0.487,-13.04
  F.Cu w0.203: TP1.1@0.47,-7.18 0.47,-7.84 C73.2@0.51,-7.88
  F.Cu w0.4: v1(-12.1,-21.13) -12.07,-21.16 R80.2@-11.354,-21.16 ; C69.1@0.51,-9.44 C73.2@0.51,-7.88
  F.Cu w0.5: L2.2@-1.622,-10.96 0.12,-10.96 C77.1@0.45,-11.29 ; C69.1@0.44,-9.51 0.44,-12.992 FB2.2@0.487,-13.04
  In2.Cu w0.3: v1(-12.1,-21.13) -11.36,-20.39 -11.36,-18.76 -7.98,-15.38 -1.97,-15.38 v1(-0.3,-13.71)
  B.Cu w0.102: v1(-0.3,-13.71) 0.04,-13.37 C97.1@0.43,-13.37 0.4,-13.34 C98.1@0.4,-11.597
  other v1: 0.16,-12.52 0.62,-12.51 0.18,-12.1 0.64,-12.09
+24V: C6.1 C17.1 C19.1 C24.1 C25.1 C33.1 C39.1 C49.1 C55.1 C58.1 C59.1 C60.1 C61.1 C62.1 C70.1 C74.1 C96.1 D1.1 FB4.2 J1.2 J5.2 Q1.5 Q3.5 Q5.5 R79.2 TP40.1 | length 11.4
  F.Cu w0.102: C74.1@10.767,-16.96 11.277,-17.47 TP40.1@13.16,-17.47 ; C24.1@23.883,4.381 C24.1@23.923,4.421 ; C33.1@24.305,-3.774 C33.1@24.345,-3.734 ; C33.1@24.305,-3.049 C33.1@24.345,-3.009 ; C24.1@24.453,4.361 C24.1@24.493,4.401
  F.Cu w0.8: FB4.2@1.13,-20.605 1.13,-22.144 J1.2@3.74,-24.754
  B.Cu w0.102: C6.1@24.225,-9.099 C6.1@24.53,-8.794 C6.1@24.24,-8.504
  B.Cu w0.152: R79.2@24.995,10.986 25.755,10.986 26.195,10.546 v1(26.195,9.396)
  other v1: 4.382,-26.794 4.955,-26.794 3.809,-26.784 2.091,-26.754 2.664,-26.764 3.236,-26.764 11.141,-22.404 11.645,-22.414 12.175,-22.414 15.481,-21.334 15.985,-21.344 16.515,-21.344 11.755,-20.094 11.251,-20.084 11.215,-18.034 11.719,-18.044 12.249,-18.044 11.181,-17.544 11.685,-17.544 12.215,-17.544 11.201,-17.054 11.718,-17.054 12.235,-17.054 15.311,-16.254 15.815,-16.264 16.345,-16.264 18.716,-15.69 19.364,-15.69 20.011,-15.69 20.659,-15.69 21.307,-15.69 21.955,-15.69 22.602,-15.69 23.25,-15.69 11.605,-14.108 11.615,-13.604 11.615,-13.074 24.215,-12.284 24.725,-12.254 24.215,-11.754 24.725,-11.749 24.225,-11.249 24.725,-11.244 23.96,-9.339 24.435,-9.339 24.925,-9.339 24.435,-8.834 24.925,-8.824 23.96,-8.794 23.96,-8.329 24.435,-8.329 24.925,-8.329 24.055,-6.334 24.625,-6.334 24.055,-5.829 24.625,-5.829 24.055,-5.324 24.625,-5.324 24.285,-3.874 24.805,-3.849 24.285,-3.344 24.805,-3.344 24.295,-2.839 24.805,-2.839 24.145,-1.174 24.715,-1.174 24.145,-0.584 24.715,-0.584 24.175,1.061 24.745,1.061 24.175,1.566 24.745,1.566 24.175,2.071 24.745,2.071 24.635,3.306 24.065,3.326 24.035,3.861 24.605,3.841 24.615,4.391 24.045,4.411 24.595,4.931 24.025,4.951 25.135,6.706 24.085,6.721 24.655,6.721 25.135,7.211 24.085,7.226 24.655,7.226 25.135,7.716 24.085,7.731 24.655,7.731 25.135,8.766 24.085,8.781 24.605,8.776 24.085,9.371 24.605,9.366 25.135,9.356
AGND: C20.2 C21.2 C22.2 C23.2 C32.2 C34.2 C35.2 C51.2 C56.1 C57.2 C84.1 R38.1 R45.1 U1.H8 U1.J8 U3.11 | length 15.5
  F.Cu w0.102: v1(-4.365,-1.804) C56.1@-3.925,-1.804 ; v1(1.49,13.58) v1@1.516,13.554
  F.Cu w0.15: U1.J8@1.49,20.46 U1.H8@1.49,21.26 v1(1.89,20.86)
  F.Cu w0.25: v1(-3.745,7.676) U3.11@-3.745,6.496 -3.745,3.526 v1(-3.735,3.516)
  F.Cu w0.3: v1(-0.91,13.08) -0.67,13.32 C35.2@-0.67,13.51 ; U1.J8@1.49,20.46 v1(1.89,20.86) ; v1@1.516,13.554 C32.2@2.555,13.554
  F.Cu w0.4: C51.2@-7.625,9.416 C51.2@-7.625,9.358 -5.747,9.358 C57.2@-5.725,9.336
  F.Cu w0.5: C57.2@-5.725,9.336 -5.67,9.392 R45.1@-5.67,10.48
  In2.Cu w0.25: v1(-3.735,3.516) v1(-3.735,5.176)
  B.Cu w0.203: C20.2@2.224,20.324 C20.2@2.288,20.388 ; C22.2@3.38,20.388 C22.2@3.39,20.398
  B.Cu w0.3: v1(-3.735,5.176) -3.405,4.846 C84.1@-2.87,4.846 ; v1(1.89,20.86) 1.89,20.558 C20.2@2.09,20.358 ; v1(4.26,15.94) 4.26,16.63 C34.2@4.42,16.79
  other v1: -5.04,10.29 -4.58,10.6 -5.03,10.74
BGND: C6.2 C17.2 C19.2 C24.2 C25.2 C33.2 C39.2 C49.2 C52.2 C54.2 C55.2 C58.2 C59.2 C60.2 C61.2 C62.2 C64.2 C66.2 C70.2 C74.2 C96.2 D1.2 D10.2 J1.1 J5.1 R3.1 R6.1 R11.1 R13.1 R52.1 R55.1 R78.1 R87.1 U5.9 U5.11 U6.9 U6.11 U9.9 U9.11 | length 72.8
  F.Cu w0.102: R6.1@-6.285,-1.814 -6.215,-1.814 R6.1@-6.065,-1.964
  F.Cu w0.127: R6.1@-6.285,-1.814 -5.957,-2.141 -5.957,-4.487 -4.628,-5.816 0.982,-5.816 3.882,-8.716 5.467,-8.716 5.695,-8.944 R55.1@5.695,-10.955 ; R13.1@-0.935,9.436 -1.238,9.739 -1.238,10.028 -0.935,10.331 1.895,10.331 2.273,9.953 2.273,8.899 3.657,7.514 5.157,7.514 5.645,7.026 R78.1@5.645,5.275 ; R11.1@-0.305,-1.824 -0.623,-2.141 -0.623,-2.62 -0.204,-3.039 0.075,-3.039 v1(0.227,-2.887) ; v1(3.167,-3.315) 2.951,-3.315 2.777,-3.141 2.777,-1.967 4.138,-0.606 5.367,-0.606 5.625,-0.864 R52.1@5.625,-2.845
  F.Cu w0.25: U9.9@17.811,12.596 U9.11@18.718,12.596 ; U9.11@18.571,12.74 U9.11@18.898,13.066 ; v1(23.457,11.004) 23.457,11.612 C64.2@23.575,11.73 v1@23.575,10.977
  F.Cu w0.3: v1(22.895,10.296) v1@23.575,10.977
  B.Cu w0.127: v1(0.227,-2.887) 0.38,-3.039 2.676,-3.039 2.951,-3.315 v1(3.167,-3.315)
  B.Cu w0.2: C60.2@21.81,9.296 21.81,9.816 C60.2@21.875,9.881
  B.Cu w0.25: U5.9@12.593,-4.344 13.5,-4.344 U5.11@14,-4.844 ; v2(17.635,-3.404) 17.635,-3.359 C54.2@18.2,-2.794 C54.2@18.18,-2.814
  B.Cu w0.3: U6.9@13.171,3.336 14.078,3.336 U6.11@14.578,2.836 ; C52.2@18.89,4.836 19.165,4.836 19.175,4.846 v1(19.715,4.846)
  B.Cu w0.5: v1(-11.938,-25.384) v1@-11.24,-25.384 ; J5.1@-2.73,-24.754 -4.894,-22.59 -9.21,-22.59 -10.6,-23.98 -10.6,-24.49 ; v1@-11.24,-25.384 -10.6,-24.744 -10.6,-24.49 ; v1@-11.24,-25.384 v1(-10.6,-25.384) -10.6,-24.49
  B.Cu w1.2: D1.2@3.574,-19.11 3.574,-19.588 J1.1@8.74,-24.754
  other v1: -11.492,-25.384 -11.046,-25.384 3.685,-18.014 4.345,-18.014 5.005,-18.014 3.695,-17.544 4.355,-17.544 5.015,-17.544 3.668,-17.044 4.328,-17.044 4.988,-17.044 19.295,-12.73 20.06,-12.73 4.055,-12.454 4.583,-12.424 5.097,-12.424 5.611,-12.424 6.125,-12.424 6.639,-12.424 22.335,-12.209 7.211,-12.144 4.055,-11.994 4.603,-11.894 5.117,-11.894 5.631,-11.894 6.145,-11.894 6.659,-11.894 22.325,-11.749 7.211,-11.634 7.725,-11.634 4.055,-11.534 22.325,-11.304 4.055,-11.074 7.295,-11.078 7.805,-11.078 4.055,-10.614 7.295,-10.564 7.805,-10.564 13.535,-4.464 14.005,-4.464 14.485,-4.464 3.965,-4.294 7.495,-4.288 4.445,-4.284 4.959,-4.284 5.473,-4.284 5.987,-4.284 6.501,-4.284 7.015,-4.284 13.545,-3.924 14.015,-3.924 14.495,-3.924 22.425,-3.904 3.965,-3.784 4.445,-3.774 4.959,-3.774 5.473,-3.774 5.987,-3.774 6.501,-3.774 7.015,-3.774 7.495,-3.774 7.925,-3.774 22.415,-3.444 7.275,-3.304 7.785,-3.314 22.415,-2.999 7.285,-2.854 7.795,-2.864 7.785,-2.414 7.275,-2.404 14.845,2.816 14.305,2.826 14.305,3.306 14.845,3.296 22.405,3.601 14.305,3.776 14.845,3.766 3.935,3.842 4.455,3.856 4.96,3.856 5.465,3.856 5.97,3.856 6.475,3.856 6.98,3.856 7.485,3.856 22.395,4.061 4.435,4.346 4.948,4.346 5.462,4.346 5.975,4.346 6.488,4.346 7.002,4.346 7.515,4.346 3.935,4.356 22.395,4.506 7.845,4.846 7.345,4.866 3.935,4.956 7.855,5.296 7.355,5.316 3.935,5.47 7.595,5.716 23.225,10.606 18.655,12.336 19.195,12.326 19.195,12.806 18.655,12.816 18.655,13.286 19.195,13.276
CLK: R89.1 TP19.1 U10.2 | length 11.5
  F.Cu w0.102: v1(1.3,4.74) 1.31,4.73 TP19.1@1.99,4.73
  B.Cu w0.102: R89.1@1.8,10.46 1.8,9.68 1.3,9.18 v1(1.3,4.74) 1.3,1.5 1.504,1.296 U10.2@2.805,1.296
CSN: R88.1 TP18.1 U10.1 | length 10.1
  F.Cu w0.102: v1(1.74,4.02) 1.742,4.022 TP18.1@1.99,4.022
  B.Cu w0.102: R88.1@2.75,10.46 2.75,10.03 1.74,9.02 v1(1.74,4.02) 1.74,2.28 2.074,1.946 U10.1@2.805,1.946
DCDC_GND: C10.2 C82.2 C111.2 C112.2 C113.2 C114.2 C115.2 C117.2 R21.2 U1.N1 U1.P2 | length 18.3
  F.Cu w0.102: C111.2@-7.685,12.31 C111.2@-7.665,12.29 ; C111.2@-7.665,12.468 C111.2@-7.665,12.29 ; C111.2@-7.665,12.68 C111.2@-7.665,12.29
  F.Cu w0.35: C112.2@-5.79,16.762 -5.372,17.18 v1(-5.29,17.18) -5.26,17.21 -4.16,17.21 U1.N1@-4.11,17.26 U1.P2@-3.31,16.46
  F.Cu w0.4: C82.2@-7.695,14.8 -8.14,15.245 C10.2@-8.14,16.095 C114.2@-6.92,16.095 -6.457,16.095 C112.2@-5.79,16.762
  In1.Cu w0.6: v1(-8.05,15.34) -7.89,15.18 v1(-7.89,12.464)
  In2.Cu w0.203: v1(-7.89,12.464) v1(-7.89,14.339)
  B.Cu w0.4: v1(-6.25,16.33) -6.21,16.33 -5.36,17.18 v1(-5.29,17.18)
  B.Cu w0.6: v1(-8.05,15.34) -7.24,15.34 v1(-6.25,16.33) ; v1(-7.89,12.932) -7.688,12.73 C117.2@-5.69,12.73
  other v1: -7.89,13.401 -7.89,13.87
DCDC_LP: L1.2 R22.1 U1.N2 U1.P3 | length 5.7
  F.Cu w0.102: L1.2@-2.46,13.665 L1.2@-2.435,13.64
  F.Cu w0.2: v1(-3.14,13.35) -2.85,13.64 L1.2@-2.435,13.64
  F.Cu w0.3: U1.P3@-2.51,16.44 U1.P3@-2.46,16.44
  F.Cu w0.35: U1.N2@-3.31,17.26 U1.P3@-2.51,16.46 L1.2@-2.51,13.715
  F.Cu w0.5: L1.2@-2.51,13.715 L1.2@-2.435,13.64
  B.Cu w0.2: v1(-3.14,13.35) -2.73,12.94 R22.1@-2.73,12.73
Earth: C16.2 C83.1 R69.1 U7.5 | length 10
  B.Cu w0.3: R69.1@-22.81,2.973 R69.1@-22.67,2.832
  B.Cu w0.5: R69.1@-22.81,2.973 -22.802,2.98 C83.1@-20.36,2.98 -20.36,3.255 C16.2@-18.055,5.56
  B.Cu w0.635: U7.5@-26.14,1.71 -24.072,1.71 R69.1@-22.81,2.973
GND: C1.2 C2.2 C3.2 C4.2 C5.2 C8.1 C9.2 C11.2 C12.2 C13.1 C14.2 C18.1 C36.2 C37.2 C38.2 C40.2 C41.2 C42.2 C43.2 C44.2 C45.2 C46.1 C47.1 C48.2 C50.2 C65.2 C67.2 C69.2 C71.1 C73.1 C75.2 C76.2 C77.2 C79.2 C80.2 C81.2 C83.2 C85.2 C86.2 C87.2 C88.2 C89.2 C90.2 C91.2 C92.2 C94.2 C95.2 C97.2 C98.2 C99.2 C100.2 C101.2 C102.2 C103.2 C104.2 C106.2 C107.2 C108.2 C109.2 C110.2 C116.2 D6.2 FPC2.8 FPC2.9 FPC2.11 FPC2.12 LED3.1 LED5.1 R2.2 R3.2 R7.2 R8.1 R10.2 R21.1 R32.2 R42.2 R44.2 R45.2 R56.2 R57.1 R59.2 R69.2 R70.1 R83.1 R84.1 R85.1 R128.2 TP37.1 TP39.1 U1.A1 U1.A14 U1.E5 U1.E10 U1.F7 U1.F8 U1.G7 U1.G8 U1.H7 U1.J7 U1.K5 U1.K10 U1.N3 U1.P1 U1.P14 U8.1 U10.5 U10.13 U13.5 U13.9 U14.1 U29.1 U29.2 U29.3 U29.4 X1.2 X1.4 | length 56.3
  F.Cu w0.102: v1(8.41,18) 8.78,17.63 C37.2@8.88,17.63
  F.Cu w0.127: R128.2@-20.96,13.7 -20.91,13.75 C103.2@-19.97,13.75 ; v1(2.69,20.86) 2.69,20.06 U1.K10@3.09,19.66 ; v1@6.62,27.19 v1(6.62,27.21)
  F.Cu w0.178: U1.J7@0.69,20.46 v1(1.09,20.06) ; U1.H7@0.69,21.26 v1(1.09,20.86) ; U1.A14@6.29,26.86 v1@6.62,27.19
  F.Cu w0.2: v1(-4.51,16.01) v1(-4.51,16.433) -4.067,16.433 U1.P1@-4.06,16.44 ; U1.A1@-4.11,26.86 -4.11,27.3 v1@-4.1,27.31 ; U1.H7@0.69,21.26 v1(1.09,21.66) ; U1.G7@0.69,22.06 U1.G8@1.49,22.06 ; U1.F7@0.69,22.86 U1.F8@1.49,22.86
  F.Cu w0.254: U1.N3@-2.51,17.26 v1(-2.11,17.66) ; v1(-1.31,19.26) U1.K5@-0.91,19.66 ; v1(-1.31,24.06) U1.E5@-0.91,23.66 ; U1.E10@3.09,23.66 v1(3.49,23.26) ; U1.P14@6.29,16.46 v1(6.69,16.06)
  F.Cu w0.3: R83.1@-11.41,-16.916 -10.46,-17.866 C91.2@-10.394,-17.866 ; U1.F7@0.69,22.86 U1.G7@0.69,22.06 v1(1.09,21.66) U1.G8@1.49,22.06 U1.F8@1.49,22.86
  F.Cu w0.5: C76.2@-0.25,-16.085 -0.16,-15.995 C75.2@1.12,-15.995
  In2.Cu w0.3: v1(-12.64,-19.42) -12.96,-19.74 v1(-12.96,-22.06) v1(-11.5,-22.06)
  B.Cu w0.102: R32.2@-13.49,21.26 -13.49,21.81 v1(-13.47,21.83) ; v1(-11.74,15.57) -11.238,15.57 C48.2@-11.098,15.71 ; v1(-11.57,12.93) -11.54,12.9 R21.1@-9.922,12.9 ; R7.2@-11.53,21.27 -11.5,21.24 R56.2@-11.5,20.29 ; C12.2@-1.39,15.732 C88.2@-0.54,15.732
  B.Cu w0.15: R59.2@-11.09,17.83 -11.09,18.17 -10.81,18.45 -9.85,18.45 -9.1,19.2 R2.2@-8.33,19.2
  B.Cu w0.152: v1(1.09,20.06) 1.196,19.954 C85.2@1.196,19.51
  B.Cu w0.2: v1(-4.51,16.01) -4.41,15.91 C8.1@-3.936,15.91 ; U10.13@-2.795,1.296 -0.816,1.296 ; v1(-0.845,2.986) -0.816,2.958 -0.816,1.296 ; U10.5@2.805,-0.654 1.134,-0.654 -0.816,1.296
  B.Cu w0.203: C13.1@-18.639,-10.514 -18.639,-11.29 v1(-18.625,-11.304) ; C47.1@-17.725,9.764 -16.945,8.984 v1(-16.945,7.966) ; C18.1@-14.411,-10.402 -14.411,-11.248 v1(-14.395,-11.264) ; R59.2@-11.12,17.72 -11.09,17.75 R59.2@-11.09,17.83
  B.Cu w0.3: v1(-6.04,26.44) C41.2@-5.4,26.44 ; v1(0.53,-16.44) v1(0.53,-15.99) 0.71,-15.99 v1(0.93,-16.21) 0.76,-16.21 v1(0.53,-16.44)
  B.Cu w0.5: U29.4@-23.107,8.691 -23.09,8.675 -23.09,7.04 -22.81,6.76 R69.2@-22.81,5.897 -22.778,5.93 C83.2@-20.36,5.93 ; v1(-21.66,-7.19) -22.64,-6.21 C110.2@-22.64,-5.655 -22.615,-5.63 R10.2@-20.32,-5.63 ; R42.2@-1.25,-20.34 -1.135,-20.225 v1(-0.714,-20.225) ; v1(-1.07,-16.8) 0.17,-16.8 v1(0.53,-16.44)
  other v1: -14.6,-22.13 -12.49,-22.06 -11.995,-22.06 -18.51,-21.4 -16.44,-21.29 -6.96,-21.06 -6.46,-21.06 -5.96,-21.06 -5.46,-19.05 -14.59,-19.03 -21.3,-18.46 -5.46,-18.45 -5.44,-17.96 -7.27,-17.9 -15.42,-17.61 -7.27,-17.46 -13.04,-17.21 -15.435,-16.424 -14.01,-16.42 -20.005,-15.934 -12.83,-15.77 -13.27,-15.76 -23.34,-15.68 -17.89,-15.67 -22.16,-15.09 -16.495,-14.544 -12.34,-13.76 -3.08,-13.64 -3.98,-13.63 -2.23,-13.63 -11.91,-13.16 -4.67,-12.9 -4.67,-12.13 1.65,-11.7 -22.21,-11.54 -25.42,-11.47 -24.04,-11.11 1.63,-10.86 -3.99,-10.77 -5.63,-10.55 1.62,-9.98 -25.43,-9.85 -22.71,-9.85 -23.85,-9.82 -11.06,-9.71 1.66,-9.34 -10.83,-8.95 -3.95,-8.59 1.55,-8.36 -22.41,-8.25 -6.87,-7.96 -15.21,-7.39 1.31,-7.32 0.63,-6.51 -4.23,-6.49 -2.97,-6.49 -1.71,-6.49 -0.45,-6.49 -6.35,-5.95 -11.26,-5.64 1.865,-5.394 -2.705,-4.964 0.055,-4.924 -7.09,-4.06 1.455,-4.024 -8.22,-2.81 1.355,-2.574 -5.685,-0.044 -8.435,0.516 -5.635,0.866 -8.395,2.006 2.76,4.31 -1.275,4.536 -7.04,4.56 2.735,5.756 -15.175,7.866 -12.225,7.866 -23.945,8.586 -23.875,9.826 -22.575,10.136 -7.93,10.13 -26.1,10.14 -7.93,10.57 -7.93,11.01 -22.945,11.126 -17.575,12.046 -11.58,12.33 -15.73,12.61 5.15,12.72 -12.21,12.75 -12.21,13.45 -11.58,13.47 -16.36,13.58 5.01,13.64 -24.245,13.686 -23.95,15.02 -1.18,15.05 11.28,16.02 13.02,16.21 14.56,16.26 -23.16,16.31 -20.68,16.89 9.63,16.97 11.24,17.53 -11.62,17.9 -21.34,18.57 15.45,18.79 7.2,19.05 15.56,20.24 -16.78,20.62 18.72,21.11 -17.88,21.58 5.09,21.66 5.89,21.66 17.88,22.13 -16.53,22.37 10.98,22.4 11.91,22.79 12.21,23.32 -12.99,23.37 -12.18,23.8 15.6,23.79 7.32,23.92 12.33,25.44 -10.6,26.12 1.09,26.46 1.89,26.46 -9.24,26.58 10.07,26.62 7.18,26.65 8.8,26.92 -4.03,27.27 -0.21,27.68 1.27,27.68 3.77,28.24
JTAG_TCK: FPC2.4 R41.1 | length 4.3
  F.Cu w0.102: v1(-8.34,24.39) -8.36,24.37 -8.36,23.794 FPC2.4@-8.237,23.671
  B.Cu w0.102: v1(-8.34,24.39) -7.73,23.78 -6.14,23.78 -6.03,23.67 R41.1@-5.09,23.67
JTAG_TDI: FPC2.6 U1.F3 | length 8.5
  F.Cu w0.102: v1(-9.43,23.91) -9.43,23.571 FPC2.6@-9.171,23.312
  F.Cu w0.127: v1(-2.91,23.26) U1.F3@-2.51,22.86
  B.Cu w0.102: v1(-9.43,23.91) -8.69,23.91 -8.19,23.41 -6.31,23.41 -5.83,22.93 -3.24,22.93 v1(-2.91,23.26) ; v1@-3,23.38 v1@-2.86,23.24
JTAG_TDO: FPC2.5 U1.F2 | length 7.7
  F.Cu w0.102: FPC2.5@-8.704,23.491 -8.704,24.576 -8.1,25.18 -6.71,25.18 -4.8,23.27 -3.72,23.27 U1.F2@-3.31,22.86
JTAG_TMS: FPC2.1 U1.F5 | length 7.9
  F.Cu w0.102: v1(-7.035,24.745) -6.835,24.545 FPC2.1@-6.835,24.206
  F.Cu w0.127: v1(-1.31,23.26) U1.F5@-0.91,22.86
  B.Cu w0.102: v1(-7.035,24.745) -6.76,24.47 -1.92,24.47 -1.71,24.26 -1.71,23.69 v1@-1.26,23.24
JTAG_TRST: FPC2.7 U1.G1 | length 6
  F.Cu w0.102: FPC2.7@-9.635,23.131 -8.614,22.11 -4.16,22.11 U1.G1@-4.11,22.06
MISO: R90.1 TP20.1 U10.3 | length 12.5
  F.Cu w0.102: v1(0.86,2.56) 0.907,2.607 TP20.1@1.99,2.607
  B.Cu w0.102: R90.1@0.88,10.49 0.86,10.47 v1(0.86,2.56) 0.86,1.38 1.594,0.646 U10.3@2.805,0.646
MOSI: R91.1 TP21.1 U10.4 | length 13.9
  F.Cu w0.102: v1(0.47,3.33) 0.486,3.314 TP21.1@1.99,3.314
  B.Cu w0.102: R91.1@-0.06,10.52 -0.06,9.78 0.47,9.25 v1(0.47,3.33) 0.47,1.17 1.644,-0.004 U10.4@2.805,-0.004
MOTOR-U: C53.1 Q1.1 Q1.2 Q1.3 Q2.5 TP5.1 U5.5 | length 2.8
  B.Cu w0.25: U5.5@15.407,-5.844 v1(16.205,-5.844) 16.425,-6.064 C53.1@16.82,-6.064 16.82,-7.069 v1(16.995,-7.244) ; v1@16.299,-7.219 v1(16.323,-7.244)
  other v1: 12.338,-9.214 13.009,-9.214 13.681,-9.214 14.353,-9.214 15.025,-9.214 15.697,-9.214 16.369,-9.214 17.04,-9.214 12.348,-8.574 13.019,-8.574 13.691,-8.574 14.363,-8.574 15.035,-8.574 15.707,-8.574 16.379,-8.574 17.05,-8.574 17.722,-8.574 12.339,-7.904 13.011,-7.904 13.683,-7.904 14.355,-7.904 15.027,-7.904 15.699,-7.904 16.37,-7.904 17.042,-7.904 17.714,-7.904 12.292,-7.244 12.964,-7.244 13.636,-7.244 14.308,-7.244 14.979,-7.244 15.651,-7.244 17.667,-7.244
MOTOR-V: C7.1 Q3.1 Q3.2 Q3.3 Q4.5 TP4.1 U6.5 | length 2.6
  B.Cu w0.25: U6.5@16.153,1.836 17.33,1.836 C7.1@17.36,1.806 17.36,0.799 v1(17.107,0.546)
  other v1: 12.512,-1.524 13.273,-1.524 14.034,-1.524 14.795,-1.524 15.556,-1.524 16.317,-1.524 17.078,-1.524 17.839,-1.524 12.522,-0.824 13.283,-0.824 14.044,-0.824 14.805,-0.824 15.566,-0.824 16.327,-0.824 17.088,-0.824 17.849,-0.824 12.532,-0.154 13.293,-0.154 14.054,-0.154 14.815,-0.154 15.576,-0.154 16.337,-0.154 17.098,-0.154 17.859,-0.154 14.824,0.546 15.585,0.546 16.346,0.546 17.868,0.546 12.54,0.576 13.302,0.576 14.063,0.576
MOTOR-W: C63.1 Q5.1 Q5.2 Q5.3 Q6.5 TP6.1 U9.5 | length 10.2
  F.Cu w0.25: U9.5@20.625,14.096 20.856,14.096 21.72,14.96 v2(21.72,15.97)
  F.Cu w0.3: Q5.1@19.57,9.641 19.65,9.641 20.735,10.726 v1(21.435,10.726)
  In2.Cu w0.3: v1(21.435,10.726) 21.845,11.136 21.845,15.845 v2(21.72,15.97)
  other v1: 13.367,7.056 14.088,7.056 14.809,7.056 15.53,7.076 16.252,7.076 16.973,7.076 17.694,7.076 18.415,7.076 13.367,7.796 14.088,7.796 14.809,7.796 15.53,7.816 16.252,7.816 16.973,7.816 17.694,7.816 18.415,7.816 13.327,8.506 14.048,8.506 14.769,8.506 15.49,8.526 16.212,8.526 16.933,8.526 17.654,8.526 18.375,8.526 13.32,9.226 14.042,9.226 14.763,9.226 15.484,9.246 16.205,9.246 16.926,9.246 17.647,9.246 18.368,9.246
MT_IU: Q2.1 Q2.2 Q2.3 R9.1 R55.2 | length 18.4
  F.Cu w0.102: R9.1@-5.335,-1.824 -5.295,-1.824 R9.1@-5.165,-1.954 ; Q2.1@8.865,-5.044 Q2.1@9.12,-5.299
  F.Cu w0.127: R9.1@-5.335,-1.824 -5.653,-2.141 -5.653,-4.36 -4.502,-5.511 1.108,-5.511 4.008,-8.411 5.457,-8.411 5.695,-8.174 R55.2@5.695,-6.173
  other v1: 7.425,-7.742 7.905,-7.744 8.365,-7.744 7.425,-7.228 7.905,-7.228 8.365,-7.228 7.425,-6.742 7.905,-6.742 8.365,-6.742 7.425,-6.214 7.905,-6.214 8.365,-6.214 7.425,-5.685 7.905,-5.685 8.365,-5.685 7.425,-5.167 7.905,-5.167 8.365,-5.167
MT_IV: Q4.1 Q4.2 Q4.3 R12.1 R52.2 | length 13.2
  F.Cu w0.127: R12.1@-1.235,-1.834 -0.927,-2.141 -0.927,-2.747 -0.33,-3.344 0.075,-3.344 v1(0.227,-3.497) ; v1(2.736,-3.746) 2.736,-3.53 2.473,-3.267 2.473,-1.84 4.012,-0.301 5.307,-0.301 5.625,0.016 R52.2@5.625,1.937
  B.Cu w0.127: v1(0.227,-3.497) 0.38,-3.344 2.55,-3.344 2.736,-3.53 v1(2.736,-3.746)
  other v1: 7.725,-0.605 8.255,-0.605 7.235,-0.595 7.725,-0.125 8.255,-0.125 7.235,-0.115 7.725,0.356 8.255,0.356 7.235,0.366 7.725,0.836 8.255,0.836 7.235,0.846 7.725,1.316 8.255,1.316 7.235,1.326 7.235,1.806 7.725,1.796 8.255,1.796 7.235,2.286 7.725,2.276 8.255,2.276
MT_IW: Q6.1 Q6.2 Q6.3 R16.1 R78.2 | length 12.4
  F.Cu w0.102: R78.2@5.645,10.057 R78.2@5.884,9.818
  F.Cu w0.127: R16.1@-1.855,9.426 -1.542,9.739 -1.542,10.155 -1.062,10.635 2.021,10.635 2.577,10.08 2.577,8.974 3.733,7.819 5.187,7.819 5.645,8.276 R78.2@5.645,10.057
  other v1: 7.335,7.313 7.875,7.303 7.335,7.816 7.875,7.806 7.875,8.31 7.335,8.32 7.355,8.86 7.875,8.85 7.355,9.363 7.875,9.353 7.875,9.856 7.355,9.866 7.372,10.366 7.875,10.366 7.515,10.846 4.505,10.986 5.008,10.986 5.512,10.986 6.015,10.986 6.518,10.986 7.022,10.986
Net-(C7-Pad2): C7.2 R46.2 | length 1.7
  B.Cu w0.3: C7.2@18.91,1.806 18.91,3.446 R46.2@18.97,3.506
Net-(C13-Pad2): C13.2 locked.2@-19.77,-9.391 | length 2.4
  F.Cu w0.203: locked.2@-19.77,-9.391 -19.685,-9.476 v1(-19.685,-11.144)
  B.Cu w0.203: v1(-19.685,-11.144) -19.655,-11.114 C13.2@-19.655,-10.514
Net-(C15-Pad1): C15.1 R4.1 R5.1 | length 7.1
  B.Cu w0.3: R4.1@-13.375,-2.819 R4.1@-13.325,-2.869
  B.Cu w0.5: R5.1@-17.6,-2.963 -13.332,-2.963 R4.1@-13.325,-2.956 -13.325,-3.46 C15.1@-14.915,-5.05
Net-(C16-Pad1): C16.1 R17.1 R18.1 | length 7.1
  B.Cu w0.5: R17.1@-17.59,3.283 -13.532,3.283 R18.1@-13.345,3.469 -13.345,3.8 C16.1@-15.105,5.56
Net-(C18-Pad2): C18.2 locked.7@-13.42,-9.391 | length 2.5
  F.Cu w0.203: locked.7@-13.42,-9.391 -13.42,-11.099 v1(-13.365,-11.154)
  B.Cu w0.203: v1@-13.395,-11.124 C18.2@-13.395,-10.402
Net-(C26-Pad1): C26.1 R1.1 R6.2 U3.2 | length 4.2
  F.Cu w0.25: R1.1@-8.285,-1.784 -8.283,-1.782 C26.1@-7.255,-1.782 -6.285,-0.812 R6.2@-6.285,-0.794 U3.2@-6.285,0.958
Net-(C26-Pad2): C26.2 R1.2 R34.1 U3.1 | length 27.4
  F.Cu w0.102: U3.1@-7.555,0.958 -7.555,2.595 -8.58,3.62 -8.58,11.05 -8.17,11.46 3.03,11.46 3.53,11.96 R34.1@3.53,13.5
  F.Cu w0.25: R1.2@-8.285,-0.764 -8.283,-0.766 C26.2@-7.255,-0.766 -7.555,-0.466 U3.1@-7.555,0.958
Net-(C27-Pad1): C27.1 R11.2 R24.1 U3.6 | length 4.5
  F.Cu w0.2: U3.6@-1.205,0.958 -1.205,0.096 R11.2@-0.305,-0.804 -0.305,-0.83 C27.1@0.705,-1.84 1.593,-1.84 R24.1@1.615,-1.862
Net-(C27-Pad2): C27.2 R24.2 R35.1 TP14.1 U3.7 | length 21.6